# Altium PCB group_14.PcbDoc
Units mm, origin at the board's own origin, x right, y up, seen from the top; angles counter-clockwise.
Board outline 87.88 x 127 mm, 2 copper layers (Top Layer, Bottom Layer), stack 1.1 mm thick; 53 components, 39 nets, 196 pads, 7 vias.
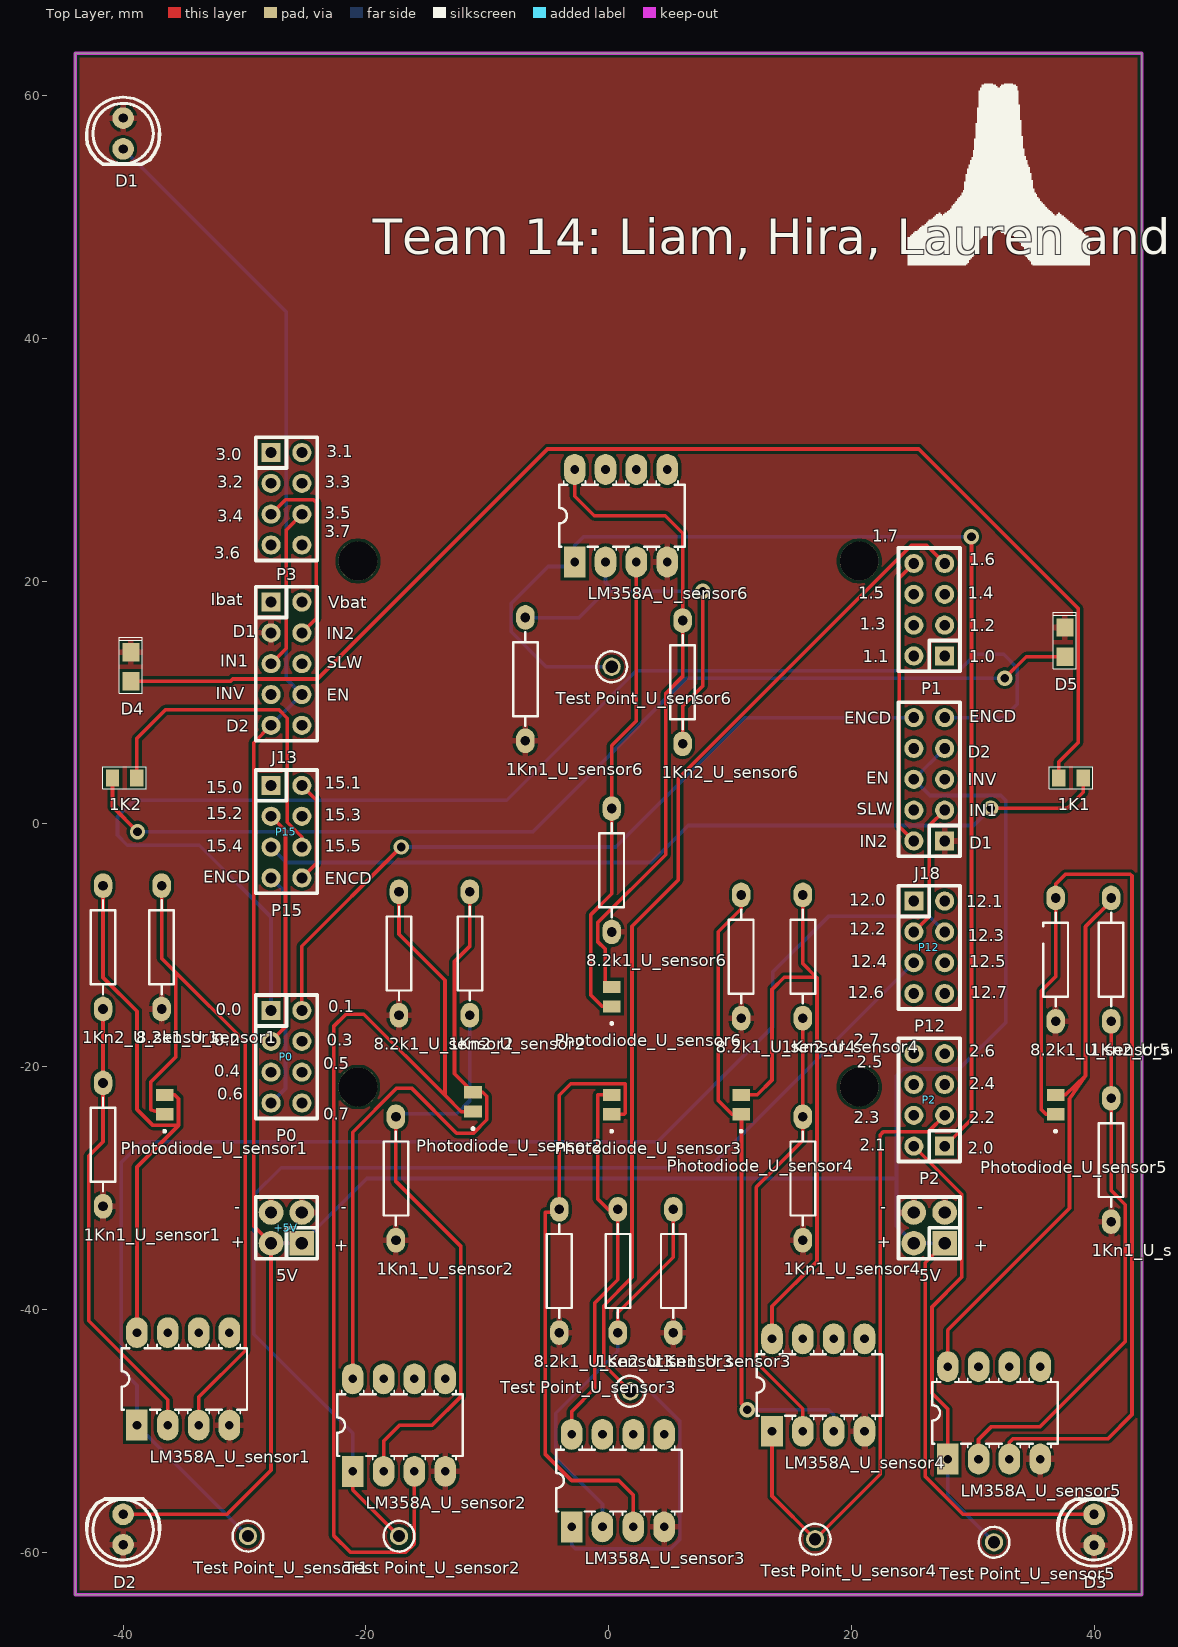
[diagram p0: Top Layer view]
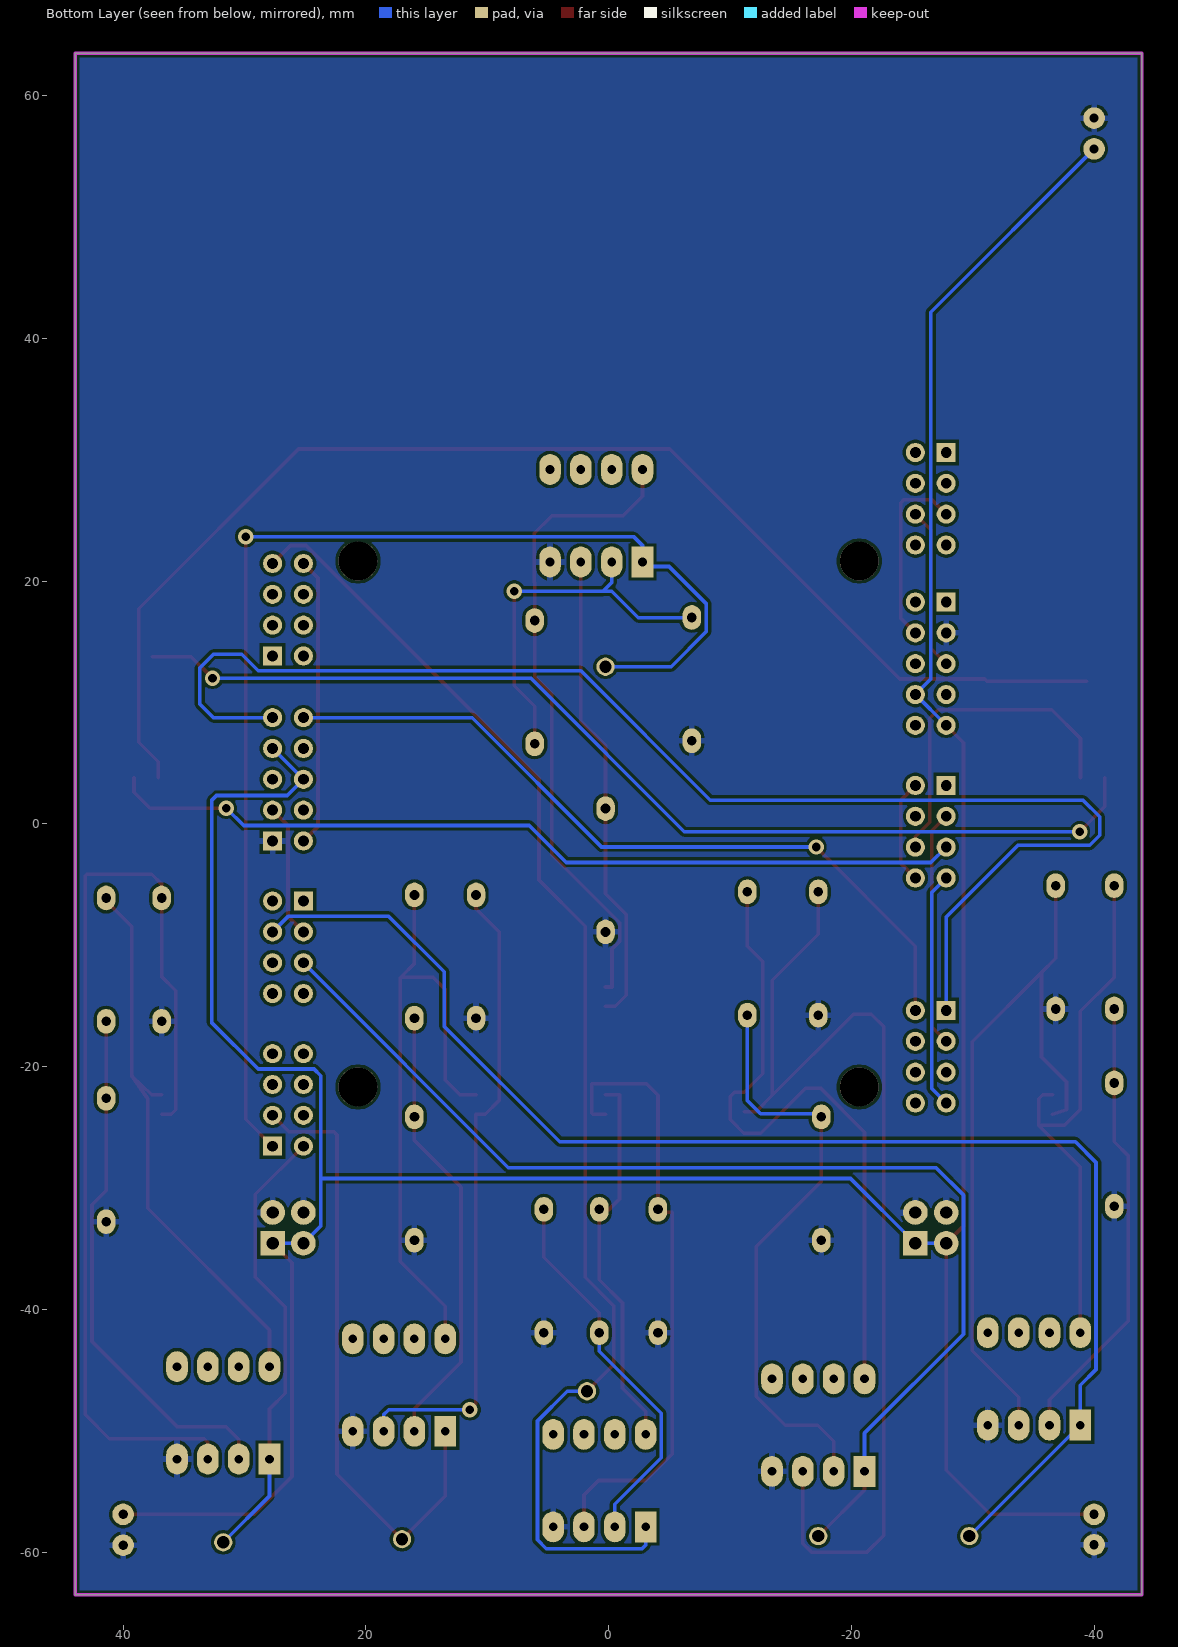
[diagram p1: Bottom Layer view, seen from below]
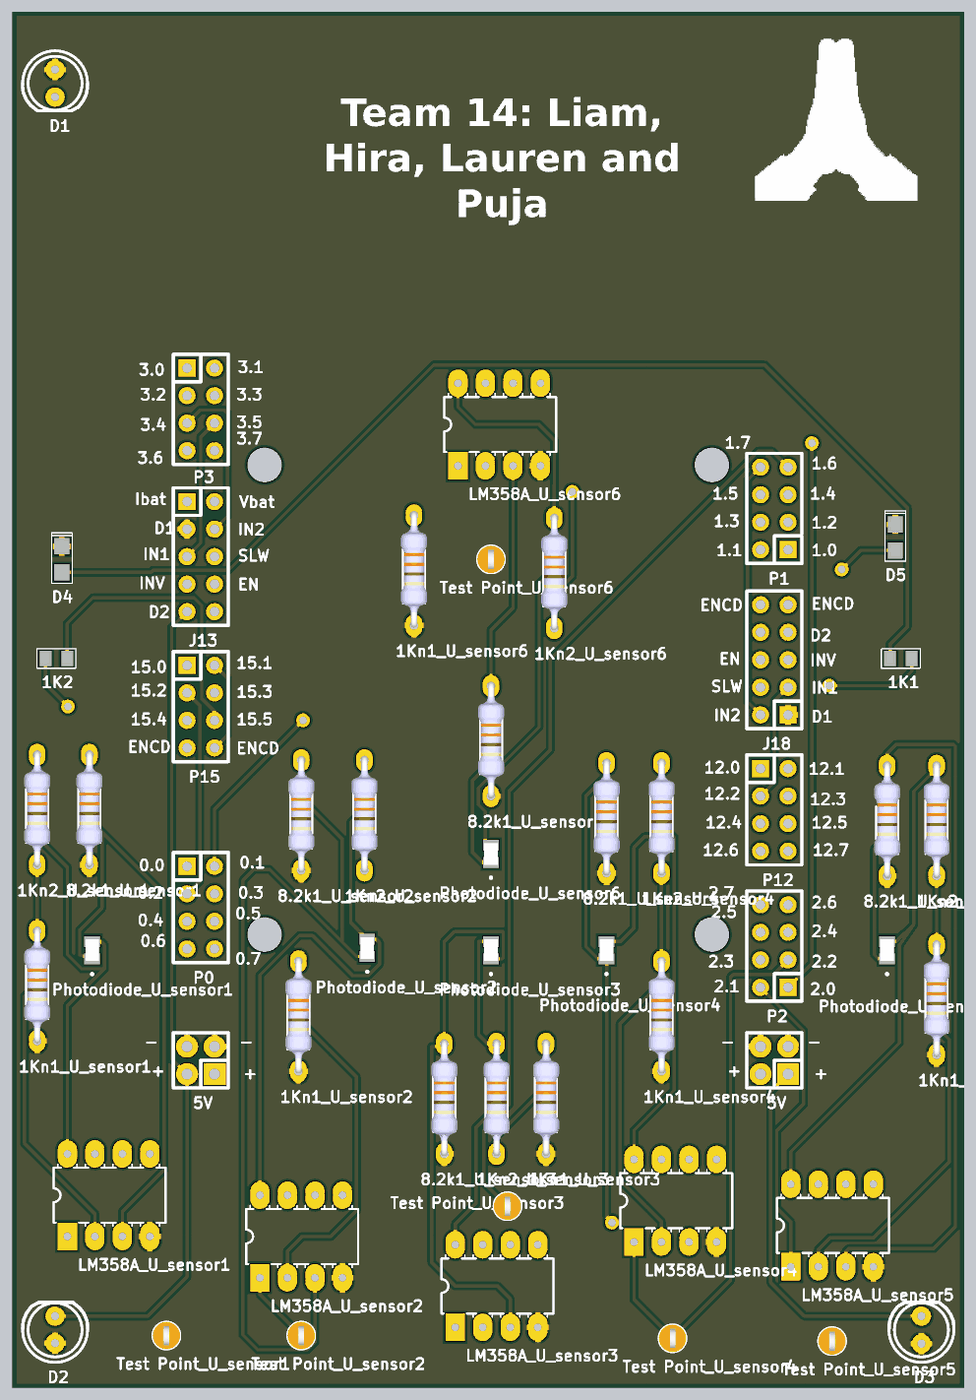
[diagram p2: 3D render of the assembled board from above, using the file's embedded part models]

## Layer stack, top to bottom
Top Solder: solder mask 0.05, Solder Resist, Dk 3.5
Top Layer: signal copper 0.1
Dielectric1: dielectric 0.9, FR-4, Dk 4.8
Bottom Layer: signal copper 0.1
Bottom Solder: solder mask 0.05, Solder Resist, Dk 3.5

## Board outline
-43.942,-63.5 43.942,-63.5 43.942,63.5 -43.942,63.5

## Design rules (kind name [scope] priority, off if disabled: settings)
Clearance [All] p1: gap=0.25 ignorepadtopadclearanceinfootprint=FALSE
HoleSize [All] p1: absolutevalues=TRUE maxlimit=3.2 minlimit=0.025 maxpercent=80.000 minpercent=20.000
PolygonConnect [All] p1: connectstyle=Relief reliefconductorwidth=0.508 reliefentries=4 polygonreliefangle="90 Angle" airgapwidth=0.254
RoomDefinition U_sensor1 [InComponentClass('U_sensor1')] p1: confinementstyle=ConfineIn formatcopy=TRUE lockcomponents=FALSE outline -43.132,-60.368 -27.892,-60.368 -27.892,-3.472 -43.132,-3.472
RoomDefinition U_sensor2 [InComponentClass('U_sensor2')] p2: confinementstyle=ConfineIn formatcopy=TRUE lockcomponents=FALSE outline -22.812,-60.368 -9.858,-60.368 -9.858,-3.98 -22.812,-3.98
RoomDefinition U_sensor3 [InComponentClass('U_sensor3')] p3: confinementstyle=ConfineIn formatcopy=TRUE lockcomponents=FALSE outline -5.54,-59.606 6.906,-59.606 6.906,-21.252 -5.54,-21.252
RoomDefinition U_sensor4 [InComponentClass('U_sensor4')] p4: confinementstyle=ConfineIn formatcopy=TRUE lockcomponents=FALSE outline 9.446,-60.622 22.908,-60.622 22.908,-4.234 9.446,-4.234
RoomDefinition U_sensor6 [InComponentClass('U_sensor6')] p5: confinementstyle=ConfineIn formatcopy=TRUE lockcomponents=FALSE outline -8.334,-16.934 7.668,-16.934 7.668,31.072 -8.334,31.072
RoomDefinition U_sensor5 [InComponentClass('U_sensor5')] p6: confinementstyle=ConfineIn formatcopy=TRUE lockcomponents=FALSE outline 26.21,-60.876 42.974,-60.876 42.974,-4.488 26.21,-4.488
RoutingVias [All] p1: holewidth=0.711 width=1.27 viastyle="Through Hole" minholewidth=0.711 minwidth=1.27 maxholewidth=0.711 maxwidth=1.27
SilkToSolderMaskClearance SilkscreenOverComponentPads [IsPad] p1: minsilkscreentomaskgap=0.1 clearancetoexposedcopper=TRUE
SolderMaskExpansion [All] p1: expansion=0.102 istentingtop=FALSE
Width Width_1 [All] p1: maxlimit=0.35 minlimit=0.254 preferedwidth=0.3
Width [(InNet('+5V') OR InNet('GND'))] p2: maxlimit=0.762 minlimit=0.254 preferedwidth=0.254 minimp=50.000000 maximp=50.000000 favimp=50.000000
28 further rules are at their usual default settings.

## Classes and differential pairs
channel class sensor: U_sensor1 U_sensor2 U_sensor3 U_sensor4 U_sensor5 U_sensor6
net class SensorInput[1..6]: SensorInput1 SensorInput2 SensorInput3 SensorInput4 SensorInput5 SensorInput6
component class U_sensor6: 1Kn1_U_sensor6 1Kn2_U_sensor6 8.2k1_U_sensor6 LM358A_U_sensor6 Photodiode_U_sensor6 "Test Point_U_sensor6"
component class U_sensor5: 1Kn1_U_sensor5 1Kn2_U_sensor5 8.2k1_U_sensor5 LM358A_U_sensor5 Photodiode_U_sensor5 "Test Point_U_sensor5"
component class U_sensor4: 1Kn1_U_sensor4 1Kn2_U_sensor4 8.2k1_U_sensor4 LM358A_U_sensor4 Photodiode_U_sensor4 "Test Point_U_sensor4"
component class U_sensor3: 1Kn1_U_sensor3 1Kn2_U_sensor3 8.2k1_U_sensor3 LM358A_U_sensor3 Photodiode_U_sensor3 "Test Point_U_sensor3"
component class U_sensor2: 1Kn1_U_sensor2 1Kn2_U_sensor2 8.2k1_U_sensor2 LM358A_U_sensor2 Photodiode_U_sensor2 "Test Point_U_sensor2"
component class U_sensor1: 1Kn1_U_sensor1 1Kn2_U_sensor1 8.2k1_U_sensor1 LM358A_U_sensor1 Photodiode_U_sensor1 "Test Point_U_sensor1"

## Components (designator, comment, footprint, x,y, rotation, side; value= is the part's Value field where it differs from the comment)
1K1 "1k" "0805 RES" 38.1,3.81 r0 top
1K2 "1k" "0805 RES" -39.878,3.81 r0 top
1Kn1_U_sensor1 "1K" ECE-RESA0.4TH -41.648,-31.5 r90 top (schematic designator 1Kn1)
1Kn1_U_sensor2 "1K" ECE-RESA0.4TH -17.518,-34.294 r90 top (schematic designator 1Kn1)
1Kn1_U_sensor3 "1K" ECE-RESA0.4TH 5.342,-41.914 r90 top (schematic designator 1Kn1)
1Kn1_U_sensor4 "1K" ECE-RESA0.4TH 16.01,-34.294 r90 top (schematic designator 1Kn1)
1Kn1_U_sensor5 "1K" ECE-RESA0.4TH 41.41,-32.77 r90 top (schematic designator 1Kn1)
1Kn1_U_sensor6 "1K" ECE-RESA0.4TH -6.85,6.854 r90 top (schematic designator 1Kn1)
1Kn2_U_sensor1 "1K" ECE-RESA0.4TH -41.648,-15.244 r90 top (schematic designator 1Kn2)
1Kn2_U_sensor2 "1K" ECE-RESA0.4TH -11.422,-15.752 r90 top (schematic designator 1Kn2)
1Kn2_U_sensor3 "1K" ECE-RESA0.4TH 0.77,-41.914 r90 top (schematic designator 1Kn2)
1Kn2_U_sensor4 "1K" ECE-RESA0.4TH 16.01,-16.006 r90 top (schematic designator 1Kn2)
1Kn2_U_sensor5 "1K" ECE-RESA0.4TH 41.41,-16.26 r90 top (schematic designator 1Kn2)
1Kn2_U_sensor6 "1K" ECE-RESA0.4TH 6.104,6.6 r90 top (schematic designator 1Kn2)
5V "5V" IDC4 27.686,-34.544 r90 top locked
8.2k1_U_sensor1 "8K2" ECE-RESA0.4TH -36.822,-15.244 r90 top (schematic designator 8.2k1)
8.2k1_U_sensor2 "8K2" ECE-RESA0.4TH -17.264,-15.752 r90 top (schematic designator 8.2k1)
8.2k1_U_sensor3 "8K2" ECE-RESA0.4TH -4.056,-41.914 r90 top (schematic designator 8.2k1)
8.2k1_U_sensor4 "8K2" ECE-RESA0.4TH 10.93,-16.006 r90 top (schematic designator 8.2k1)
8.2k1_U_sensor5 "8K2" ECE-RESA0.4TH 36.838,-16.26 r90 top (schematic designator 8.2k1)
8.2k1_U_sensor6 "8K2" ECE-RESA0.4TH 0.262,-8.894 r90 top (schematic designator 8.2k1)
+5V "5V" IDC4 -25.273,-34.544 r90 top locked
D1 "LED" LED0.1/5MM#1 -40,55.62 r180 top locked
D2 "LED" LED0.1/5MM#2 -40,-56.88 r0 top locked
D3 "LED" LED0.1/5MM#1 40,-56.88 r0 top locked
D4 "LTST-C170KGKT" "0805 LED" -39.37,12.954 r90 top
D5 "LTST-C170KGKT" "0805 LED" 37.592,14.986 r90 top
J13 "CON10" IDC10 -27.813,18.288 r270 top locked
J18 "CON10" IDC10 27.686,-1.397 r90 top locked
LM358A_U_sensor1 "LM358" ECE-DIP8TH -38.862,-49.53 r90 top (schematic designator LM358A)
LM358A_U_sensor2 "LM358" ECE-DIP8TH -21.082,-53.34 r90 top (schematic designator LM358A)
LM358A_U_sensor3 "LM358" ECE-DIP8TH -3.048,-57.912 r90 top (schematic designator LM358A)
LM358A_U_sensor4 "LM358" ECE-DIP8TH 13.462,-50.038 r90 top (schematic designator LM358A)
LM358A_U_sensor5 "LM358" ECE-DIP8TH 27.94,-52.324 r90 top (schematic designator LM358A)
LM358A_U_sensor6 "LM358" ECE-DIP8TH -2.794,21.59 r90 top (schematic designator LM358A)
P0 "P0" idc8 -27.813,-15.367 r270 top locked
P1 "P1" idc8 27.686,13.843 r90 top locked
P2 "P2" idc8 27.686,-26.543 r90 top locked
P3 "P3" idc8 -27.813,30.607 r270 top locked
P12 "P12" idc8 25.146,-6.35 r270 top locked
P15 "P15" IDC8 -27.813,3.175 r270 top locked
Photodiode_U_sensor1 "TEMD7000X01" XDCR_TEMD7000X01 -36.576,-23.114 r90 top (schematic designator Photodiode)
Photodiode_U_sensor2 "TEMD7000X01" XDCR_TEMD7000X01 -11.176,-22.898 r90 top (schematic designator Photodiode)
Photodiode_U_sensor3 "TEMD7000X01" XDCR_TEMD7000X01 0.254,-23.114 r90 top (schematic designator Photodiode)
Photodiode_U_sensor4 "TEMD7000X01" XDCR_TEMD7000X01 10.922,-23.114 r90 top (schematic designator Photodiode)
Photodiode_U_sensor5 "TEMD7000X01" XDCR_TEMD7000X01 36.83,-23.114 r90 top (schematic designator Photodiode)
Photodiode_U_sensor6 "TEMD7000X01" XDCR_TEMD7000X01 0.254,-14.224 r90 top (schematic designator Photodiode)
"Test Point_U_sensor1" "5003" TP_TH -29.718,-58.674 r90 top (schematic designator "Test Point")
"Test Point_U_sensor2" "5003" TP_TH -17.272,-58.674 r90 top (schematic designator "Test Point")
"Test Point_U_sensor3" "5003" TP_TH 1.778,-46.736 r90 top (schematic designator "Test Point")
"Test Point_U_sensor4" "5003" TP_TH 17.018,-58.928 r90 top (schematic designator "Test Point")
"Test Point_U_sensor5" "5003" TP_TH 31.75,-59.182 r90 top (schematic designator "Test Point")
"Test Point_U_sensor6" "5003" TP_TH 0.254,12.954 r90 top (schematic designator "Test Point")

## Footprints (in the part's own frame and the unit in brackets; to place one, negate y for a bottom-side part, rotate by r counter-clockwise, add the part's x,y. Pads: shape width x height; smd on the part's side, far side on the other; paste and mask are expansions set on the pad)
"0805 LED" [mm] "RED AS AlGaAs SMD LED, Body; 2mm x 1.25 mm (LxW)"
  rect 1.5x1.4 smd: 1(-1.2,0) 2(1.2,0)
  silkscreen extent -2.2,-0.95 2.45,0.95, body extent -1,-0.63 1,0.63, height 1.1
"0805 RES" [mm] "http://www.digikey.co.nz/Web%20Export/Supplier%20Content/Vishay_8026/PDF/VishayBeyschlag_SolderPad.pdf?redirected=1 with dimension G modified by +0.25mm"
  rect 1.1x1.4 smd: 1(-1,0) 2(1,0)
  silkscreen extent -1.8,-0.9 1.8,0.9, body extent -1.04,-0.66 1.04,0.66, height 0.61
ECE-DIP8TH [mil] "8 pin Dual in line"
  rect 100x70 hole 28: 1(0,0)
  oval 100x70 hole 28: 2(0,-100) 3(0,-200) 4(0,-300) 5(300,-300) 6(300,-200) 7(300,-100) 8(300,0)
  silkscreen extent 37,-357 263,50
ECE-RESA0.4TH [mil] "Resistor Axial 10mm"
  oval 80x60 hole 31.5: 1(0.16,0.32) 2(400.16,0.32)
  silkscreen extent 48,-40 352,40, body extent -7,-47 417,47, height 95
IDC4 [mil]
  rect 80x80 hole 40: 1(0,0)
  round 80 hole 40: 2(0,100) 3(100,0) 4(100,100)
  silkscreen extent -50,-50 150,150
idc8 [mil]
  rect 62x62 hole 35: 1(0,0)
  round 62 hole 35: 2(0,100) 3(100,0) 4(100,100) 5(200,0) 6(200,100) 7(300,0) 8(300,100)
  silkscreen extent -50,-50 350,150
IDC8 [mil]
  rect 62x62 hole 35: 1(0,0)
  round 62 hole 35: 2(0,100) 3(100,0) 4(100,100) 5(200,0) 6(200,100) 7(300,0) 8(300,100)
  silkscreen extent -50,-50 350,150
IDC10 [mil]
  rect 62x62 hole 35: 1(0,0)
  round 62 hole 35: 2(0,100) 3(100,0) 4(100,100) 5(200,0) 6(200,100) 7(300,0) 8(300,100) 9(400,0) 10(400,100)
  silkscreen extent -50,-50 450,150
LED0.1/5MM#1 [mil]
  round 70 hole 30: A(0,0) K(0,-100)
  silkscreen extent -118,-168 118,50
LED0.1/5MM#2 [mil]
  round 70 hole 30: A(0,0) K(0,-98.42)
  silkscreen extent -118,-168 118,50
TP_TH [mm] "Test Point, Through Hole, Dia 2.54mm"
  round 1.5 hole 1: 1(0,0)
  silkscreen extent -1.27,-1.27 1.27,1.27, body extent -1.27,-1.27 1.27,1.27, height 4.57
XDCR_TEMD7000X01 [mm]
  rect 1x1.45 smd: A(-0.8,0) C(0.8,0)
  silkscreen extent -2.3,-0.1 -2.1,0.1, body extent -1,-0.63 1,0.63, height 0.85

## Part data
1K1 1K2: library part Res_SMT_0805, "0805 resistor", ComponentLink1Description=https://nz.mouser.com/datasheet/2/315/AOA0000C304-1149620.pdf, LatestRevisionDate=17-Jul-2002, LatestRevisionNote="Re-released for DXP Platform.", PackageReference=AXIAL-0.4, Published=8-Jun-2000, Publisher="Altium Limited"
1Kn1_U_sensor1 1Kn1_U_sensor2 1Kn1_U_sensor3 1Kn1_U_sensor4 1Kn1_U_sensor5 1Kn1_U_sensor6 1Kn2_U_sensor1 1Kn2_U_sensor2 1Kn2_U_sensor3 1Kn2_U_sensor4 1Kn2_U_sensor5 1Kn2_U_sensor6: library part RES000037, "RES MF 1K0 TH", Size/Package="Axial 10mm", Voltage/Current=0.6W, Assembly Method="Through hole", Category=Resistor, Component Type=NA, Item Type=Item, Path="ece/ts/Lists/Stock Inventory", Status=Active, Supplier1="Active components", Supplier1-PN=T183997, UoA Stock#=RES000037
5V +5V: library part CON4, "Connector"
8.2k1_U_sensor1 8.2k1_U_sensor2 8.2k1_U_sensor3 8.2k1_U_sensor4 8.2k1_U_sensor5 8.2k1_U_sensor6: library part RES000048, "RES MF 8K2 TH", Size/Package="Axial 10mm", Voltage/Current=0.6W, Assembly Method="Through hole", Category=Resistor, Component Type=NA, Item Type=Item, Path="ece/ts/Lists/Stock Inventory", Status=Active, Supplier1="Active components", Supplier1-PN=T184082, UoA Stock#=RES000048
D4 D5: library part LED_SMT_0805, "SMT LED 0805 size", Color=Green, Current - Test=20mA, Lens Color=Colorless, Manufacturer="Lite-On Inc.", Millicandela Rating=35mcd, Package / Case="0805 (2012 Metric)", Supplier Part Number 1=160-1414-1-ND, Voltage - Forward (Vf) (Typ)=2V, Category=Optoelectronics, ComponentLink1Description=http://optoelectronics.liteon.com/upload/download/DS22-2000-073/LTST-C170KGKT.pdf, ComponentLink1URL=http://optoelectronics.liteon.com/upload/download/DS22-2000-073/LTST-C170KGKT.pdf, Features=-, Height (Max)=1.10mm, Lens Style/Size="Rectangle with Flat Top, 1.40mm x 1.25mm", Lens Transparency=Clear, Manufacturer Part Number=LTST-C170KGKT, Mounting Type="Surface Mount", Packaging="Cut Tape (CT)", Part Status=Active, Pricing 1="1=0.62, 10=0.459, 25=0.338, 100=0.2415, 250=0.16416, 500=0.14486, 1000=0.11347 (NZD)", RoHS="RoHS Compliant", Size / Dimension="2.00mm L x 1.25mm W", Stock 1=503069, Supplier 1=Digi-Key, Viewing Angle=130°, Wavelength - Dominant=571nm, Wavelength - Peak=574nm
J13 J18: "Connector"
LM358A_U_sensor1 LM358A_U_sensor2 LM358A_U_sensor3 LM358A_U_sensor4 LM358A_U_sensor5 LM358A_U_sensor6: library part OPA000005, "IC OPAMP LM358 DUAL TH", Manufactuer=Fairchild, Manufacturer-PN=LM358N, Size/Package=DIP8, Assembly Method="Through hole", Category=OpAmp, Datasheet Link=http://share.engineering.auckland.ac.nz/ece/ts/Student%20Documents/LM358.pdf, Item Type=Item, Path="ece/ts/Lists/Stock Inventory", Status=Active, Supplier1=Digikey, Supplier1-PN=LM358NFS-ND, Supplier2="Active Components", Supplier2-PN=LM358N, UoA Stock#=OPA000005
P0 P1 P2 P3: library part CON8, "Connector"
P12 P15: library part CON8_1, "Connector"
Photodiode_U_sensor1 Photodiode_U_sensor2 Photodiode_U_sensor3 Photodiode_U_sensor4 Photodiode_U_sensor5 Photodiode_U_sensor6: "Photodiode 900nm 100ns 120Â° 0805 (2012 Metric)", Package="0805 Vishay", Availability="In Stock", Check_prices=https://www.snapeda.com/parts/TEMD7000X01/Vishay+Semiconductor+Opto+Division/view-part/?ref=eda, MF="Vishay Semiconductor", MP=TEMD7000X01, Price=None, Purchase-URL=https://pricing.snapeda.com/search/part/TEMD7000X01/?ref=eda, SnapEDA_Link=https://www.snapeda.com/parts/TEMD7000X01/Vishay+Semiconductor+Opto+Division/view-part/?ref=snap
"Test Point_U_sensor1" "Test Point_U_sensor2" "Test Point_U_sensor3" "Test Point_U_sensor4" "Test Point_U_sensor5" "Test Point_U_sensor6": library part TestPoint, "Test Point, Orange, 1-Pin THD, RoHS", Forward Current="3 A", Forward Voltage="1.08 V", Max Operating Temperature="150 degC", Max Surge Current="80 A", Min Operating Temperature="-65 degC", Package Quantity=500, Peak Reverse Current="600 uA", ComponentLink1Description="Manufacturer URL", ComponentLink1URL=http://www.keyelco.com/, ComponentLink2Description=Datasheet, ComponentLink2URL=http://keyelco.com/userAssets/file/M65p56.pdf, DatasheetVersion=Jun-15, Diameter="5.3 mm", Height="0.25 inch", Length="9.5 mm", Mount="Through Hole", PackageDescription="1-Pin Through Hole Device, Dia 2.54 mm", PackageReference=5003, Packaging=Bulk, Pins=2, Radiation Hardening=No, REACH SVHC="No SVHC", RoHSCompliant=true, Weight="0.01 lb", Width="0.25 inch"

## Free pads (board coordinates)
  round 3.2 hole 3.2 unplated: 1(-20.65,-21.666) 1(-20.65,21.666) 1(20.65,-21.666) 1(20.65,21.666)

## Via types
v1: diameter 1.27, hole 0.711, Top Layer to Bottom Layer, 7 vias

## Nets (pads, with @x,y where several pads share a name; then routed paths per layer and width w, separated by ;. In a path a pad name is that pad's centre, name@x,y a point inside that pad or via, vN(x,y) a via of type N, cw(c..) or ccw(c..) an arc to the next point about the centre after c; other vN are vias at no path point)
+5V: 5V.1 5V.2 +5V.1 +5V.2 D1.A D2.A D3.A J13.8 J13.9 J18.6 J18.7 | length 277.6
  Top Layer w0.3: D2.A -31.44,-56.88 -27.813,-53.253 +5V.2 -29.238,-33.119 -29.238,6.703 J13.9 ; 5V.1 26.083,-36.147 26.083,-53.764 29.199,-56.88 D3.A
  Bottom Layer w0.3: D1.A -26.546,42.166 -26.546,11.941 J13.8 -25.276,10.668 -27.813,8.131 J13.9 ; +5V.2 +5V.1 -19.931,-29.202 23.721,-29.202 ; 5V.1 5V.2 23.721,-33.119 23.721,-29.202 ; J18.7 27.683,6.223 25.146,3.686 J18.6 26.484,2.345 32.306,2.345 32.712,1.938 32.712,-16.35 28.877,-20.185 24.28,-20.185 23.721,-20.744 23.721,-29.202
+5V_U_sensor1: 1Kn2_U_sensor1.2 LM358A_U_sensor1.8 Photodiode_U_sensor1.C | length 45.5
  Top Layer w0.3: 1Kn2_U_sensor1.2 -41.656,-12.644 -38.862,-15.438 -38.862,-23.515 -37.544,-24.833 -35.436,-24.833 ; LM358A_U_sensor1.8 -38.862,-28.26 -35.436,-24.833 ; Photodiode_U_sensor1.C -35.766,-22.314 -35.436,-22.644 -35.436,-24.833
+5V_U_sensor2: 1Kn2_U_sensor2.2 LM358A_U_sensor2.8 Photodiode_U_sensor2.C | length 55.8
  Top Layer w0.3: LM358A_U_sensor2.8 -21.082,-25.389 -17.453,-21.76 -16.233,-21.76 -12.525,-25.468 -11.128,-25.468 -10.036,-24.376 -10.036,-22.428 -10.366,-22.098 Photodiode_U_sensor2.C -12.703,-20.571 -12.703,-11.321 -11.43,-10.048 1Kn2_U_sensor2.2
+5V_U_sensor3: 1Kn2_U_sensor3.2 LM358A_U_sensor3.8 Photodiode_U_sensor3.C | length 31.9
  Top Layer w0.3: LM358A_U_sensor3.8 -3.048,-48.402 -1.146,-46.5 -1.146,-39.464 0.762,-37.556 1Kn2_U_sensor3.2@0.762,-31.768 ; Photodiode_U_sensor3.C -0.892,-22.314 -0.892,-30.904 -0.028,-31.768 1Kn2_U_sensor3.2@0.762,-31.768 ; 1Kn2_U_sensor3.2 1Kn2_U_sensor3.2@0.762,-31.768
+5V_U_sensor4: 1Kn2_U_sensor4.2 LM358A_U_sensor4.8 Photodiode_U_sensor4.C | length 53.2
  Top Layer w0.3: Photodiode_U_sensor4.C 12.24,-22.314 13.459,-21.095 13.459,-13.632 14.475,-12.616 17.117,-12.616 ; LM358A_U_sensor4.8 13.462,-39.743 17.168,-36.038 17.168,-12.667 17.117,-12.616 ; 1Kn2_U_sensor4.2 16.002,-11.501 17.117,-12.616
+5V_U_sensor5: 1Kn2_U_sensor5.2 LM358A_U_sensor5.8 Photodiode_U_sensor5.C | length 47.1
  Top Layer w0.3: LM358A_U_sensor5.8 27.94,-41.699 37.97,-31.669 37.97,-22.644 39.291,-20.744 ; Photodiode_U_sensor5.C 37.64,-22.314 39.291,-20.744 ; 1Kn2_U_sensor5.2 41.402,-6.342 39.291,-8.453 39.291,-20.744
+5V_U_sensor6: 1Kn2_U_sensor6.2 LM358A_U_sensor6.8 Photodiode_U_sensor6.C | length 53.5
  Top Layer w0.3: LM358A_U_sensor6.8 -2.794,27.008 -1.194,25.408 4.671,25.408 6.119,23.96 6.119,19.921 6.096,19.899 1Kn2_U_sensor6.2 6.096,12.149 4.696,10.749 4.696,-2.532 -0.908,-8.136 -0.908,-9.679 -0.282,-10.305 -0.282,-13.424 Photodiode_U_sensor6.C
GND: 1Kn1_U_sensor1.1 1Kn1_U_sensor2.1 1Kn1_U_sensor3.1 1Kn1_U_sensor4.1 1Kn1_U_sensor5.1 1Kn1_U_sensor6.1 5V.3 5V.4 8.2k1_U_sensor1.1 8.2k1_U_sensor2.1 8.2k1_U_sensor3.1 8.2k1_U_sensor4.1 8.2k1_U_sensor5.1 8.2k1_U_sensor6.1 +5V.3 +5V.4 D1.K D2.K D3.K D4.2 D5.2 J13.3 J18.1 LM358A_U_sensor1.4 LM358A_U_sensor2.4 LM358A_U_sensor3.4 LM358A_U_sensor4.4 LM358A_U_sensor5.4 LM358A_U_sensor6.4
Net1K1_1: 1K1.1 D4.1 | length 106
  Top Layer w0.3: D4.1 -31.157,11.754 -30.965,11.946 -23.98,11.946 -5.032,30.894 25.55,30.894 38.707,17.737 38.707,6.739 37.1,5.132 1K1.1
Net1K1_2: 1K1.2 P15.5 | length 71
  Top Layer w0.3: v1(31.493,1.303) 37.779,1.303 39.1,2.624 1K1.2
  Bottom Layer w0.3: P15.5 -26.551,-3.167 3.502,-3.167 6.55,-0.119 30.071,-0.119 v1(31.493,1.303)
Net1K2_1: 1K2.1 D5.1 | length 87.7
  Top Layer w0.3: 1K2.1 -40.878,1.437 v1(-38.814,-0.627) ; v1(32.636,12.022) 34.4,13.786 D5.1
  Bottom Layer w0.3: v1(-38.814,-0.627) -6.226,-0.627 6.423,12.022 v1(32.636,12.022)
Net1K2_2: 1K2.2 P15.6 | length 28
  Top Layer w0.3: 1K2.2 -38.878,7.044 -36.516,9.406 -27.155,9.406 -26.47,8.72 -26.47,0.152 -25.273,-1.044 P15.6
Net1Kn1_U_sensor1_2: 1Kn1_U_sensor1.2 1Kn2_U_sensor1.1 LM358A_U_sensor1.2 | length 37.5
  Top Layer w0.3: 1Kn2_U_sensor1.1 1Kn1_U_sensor1.2 -41.656,-26.177 -42.827,-27.348 -42.827,-40.937 -36.322,-47.442 LM358A_U_sensor1.2
Net1Kn1_U_sensor2_2: 1Kn1_U_sensor2.2 1Kn2_U_sensor2.1 LM358A_U_sensor2.2 | length 49.5
  Top Layer w0.3: LM358A_U_sensor2.2 -18.542,-50.863 -17.224,-49.545 -14.554,-49.545 -12.169,-47.16 -12.169,-34.816 -17.526,-29.459 1Kn1_U_sensor2.2
  Bottom Layer w0.3: 1Kn1_U_sensor2.2 -17.526,-23.868 -12.522,-23.868 -11.43,-22.776 1Kn2_U_sensor2.1
Net1Kn1_U_sensor3_2: 1Kn1_U_sensor3.2 1Kn2_U_sensor3.1 LM358A_U_sensor3.2 | length 31.8
  Top Layer w0.3: 1Kn2_U_sensor3.1 0.762,-40.275 5.334,-35.703 1Kn1_U_sensor3.2
  Bottom Layer w0.3: LM358A_U_sensor3.2 -0.508,-56.053 -4.346,-52.215 -4.346,-48.557 0.762,-43.449 1Kn2_U_sensor3.1
Net1Kn1_U_sensor4_2: 1Kn1_U_sensor4.2 1Kn2_U_sensor4.1 LM358A_U_sensor4.2 | length 37.2
  Top Layer w0.3: LM358A_U_sensor4.2 16.002,-48.176 12.164,-44.338 12.164,-29.916 16.002,-26.078 1Kn1_U_sensor4.2 1Kn2_U_sensor4.1
Net1Kn1_U_sensor5_2: 1Kn1_U_sensor5.2 1Kn2_U_sensor5.1 LM358A_U_sensor5.2 | length 43.9
  Top Layer w0.3: LM358A_U_sensor5.2 30.48,-50.713 31.544,-49.649 35.557,-49.649 42.568,-42.639 42.568,-31.361 41.402,-30.196 1Kn1_U_sensor5.2 1Kn2_U_sensor5.1
Net1Kn1_U_sensor6_2: 1Kn1_U_sensor6.2 1Kn2_U_sensor6.1 LM358A_U_sensor6.2 | length 31.5
  Top Layer w0.3: 1Kn2_U_sensor6.1 6.096,9.711 7.77,11.384 v1(7.77,19.185)
  Bottom Layer w0.3: 1Kn1_U_sensor6.2 -6.858,17 -2.438,17 -0.254,19.185 0.457,19.185 ; LM358A_U_sensor6.2 -0.254,19.896 0.457,19.185 ; v1(7.77,19.185) 0.457,19.185
Net8.2k1_U_sensor1_2: 8.2k1_U_sensor1.2 LM358A_U_sensor1.3 Photodiode_U_sensor1.A | length 62.3
  Top Layer w0.3: 8.2k1_U_sensor1.2 -36.83,-11.067 -35.664,-12.232 ; Photodiode_U_sensor1.A -37.722,-23.538 -37.722,-21.252 -35.664,-19.195 -35.664,-12.232 ; LM358A_U_sensor1.3 -33.782,-47.233 -29.949,-43.401 -29.949,-17.947 -35.664,-12.232
Net8.2k1_U_sensor2_2: 8.2k1_U_sensor2.2 LM358A_U_sensor2.3 Photodiode_U_sensor2.A | length 89
  Top Layer w0.3: 8.2k1_U_sensor2.2 -17.272,-9.085 -13.483,-12.875 -13.483,-22.359 ; LM358A_U_sensor2.3 -16.002,-59.273 -16.716,-59.987 -21.288,-59.987 -22.66,-58.615 -22.66,-16.68 -21.644,-15.664 -20.178,-15.664 -13.483,-22.359 ; Photodiode_U_sensor2.A -12.144,-23.698 -13.483,-22.359
Net8.2k1_U_sensor3_2: 8.2k1_U_sensor3.2 LM358A_U_sensor3.3 Photodiode_U_sensor3.A | length 51.4
  Top Layer w0.3: Photodiode_U_sensor3.A 1.293,-23.914 1.379,-23.828 1.379,-21.404 -3.127,-21.404 -4.064,-22.341 8.2k1_U_sensor3.2 -4.064,-31.996 -5.235,-31.996 -5.235,-51.91 -3.051,-54.094 0.838,-54.094 2.032,-55.288 LM358A_U_sensor3.3
Net8.2k1_U_sensor4_2: 8.2k1_U_sensor4.2 LM358A_U_sensor4.3 Photodiode_U_sensor4.A | length 53.3
  Top Layer w0.3: 8.2k1_U_sensor4.2 10.922,-6.977 9.025,-8.875 9.025,-22.776 10.163,-23.914 Photodiode_U_sensor4.A 10.945,-23.914 10.945,-47.77 v1(11.427,-48.252)
  Bottom Layer w0.3: v1(11.427,-48.252) 18.11,-48.252 18.542,-48.684 LM358A_U_sensor4.3
Net8.2k1_U_sensor5_2: 8.2k1_U_sensor5.2 LM358A_U_sensor5.3 Photodiode_U_sensor5.A | length 83.9
  Top Layer w0.3: LM358A_U_sensor5.3 33.02,-50.942 33.322,-50.64 41.145,-50.64 43.126,-48.659 43.126,-4.285 42.974,-4.132 37.64,-4.132 36.83,-4.942 8.2k1_U_sensor5.2 36.83,-12.562 35.659,-13.734 35.659,-23.538 36.035,-23.914 Photodiode_U_sensor5.A
Net8.2k1_U_sensor6_2: 8.2k1_U_sensor6.2 LM358A_U_sensor6.3 Photodiode_U_sensor6.A | length 39.3
  Top Layer w0.3: Photodiode_U_sensor6.A -0.541,-15.024 -1.458,-14.107 -1.458,-7.465 0.254,-5.753 8.2k1_U_sensor6.2 0.254,6.459 2.286,8.491 LM358A_U_sensor6.3
NetJ13_4: J13.4 P3.5 | length 15.6
  Top Layer w0.3: P3.5 -26.611,26.729 -24.336,26.729 -24.082,26.475 -24.082,16.939 J13.4
NetJ13_5: J13.5 P3.6 | length 13.4
  Top Layer w0.3: J13.5 -26.546,14.475 -26.546,24.254 P3.6
NetJ18_2: J18.2 P1.8 | length 23.9
  Top Layer w0.3: J18.2 23.949,-0.2 23.949,20.266 P1.8
NetJ18_3: J18.3 P12.3 | length 11.1
  Top Layer w0.3: P12.3 26.413,-7.623 26.413,-0.13 J18.3
NetJ18_9: J18.9 P0.1 | length 114.3
  Bottom Layer w0.3: P0.1 -27.813,-7.666 -33.734,-1.745 -39.652,-1.745 -40.465,-0.932 -40.465,0.592 -39.093,1.964 -8.385,1.964 2.283,12.632 28.877,12.632 30.223,13.978 32.56,13.978 33.678,12.86 33.678,9.881 32.56,8.763 J18.9
NetJ18_10: J18.10 P0.2 | length 63.5
  Top Layer w0.3: P0.2 -25.273,-10.073 v1(-17.097,-1.897)
  Bottom Layer w0.3: v1(-17.097,-1.897) 0.581,-1.897 11.242,8.763 J18.10
NetP0_3: P0.3 P15.3 | length 19.5
  Top Layer w0.3: P0.3 -26.622,-16.716 -26.622,-0.556 P15.3
NetP0_7: P0.7 P15.7 | length 19.5
  Bottom Layer w0.3: P0.7 -26.622,-21.796 -26.622,-5.636 P15.7
NetP15_2: P15.2 P15.8 | length 8.6
  Top Layer w0.3: P15.8 -24.082,-3.254 -24.082,1.984 P15.2
SensorInput1: "Test Point_U_sensor1.1" LM358A_U_sensor1.1 P12.4 | length 114.5
  Bottom Layer w0.3: -29.718,-58.674 LM358A_U_sensor1.1 -38.862,-47.995 -38.862,-46.246 -40.16,-44.947 -40.16,-27.881 -38.458,-26.18 4.036,-26.18 13.535,-16.68 13.535,-12.184 18.107,-7.612 26.408,-7.612 P12.4
SensorInput2: "Test Point_U_sensor2.1" LM358A_U_sensor2.1 P12.5 | length 95.4
  Top Layer w0.3: LM358A_U_sensor2.1 -21.082,-54.864 -17.272,-58.674
  Bottom Layer w0.3: LM358A_U_sensor2.1 -21.082,-50.185 -29.238,-42.029 -29.238,-30.574 -26.978,-28.313 8.263,-28.313 P12.5
SensorInput3: "Test Point_U_sensor3.1" LM358A_U_sensor3.1 P1.7 | length 110.2
  Top Layer w0.3: 1.778,-46.736 -0.409,-44.549 -0.409,-39.692 1.929,-37.354 1.929,-8.424 5.738,-4.615 5.738,3.747 24.935,22.944 26.205,22.944 P1.7
  Bottom Layer w0.3: LM358A_U_sensor3.1 -3.048,-59.406 -2.746,-59.708 5.128,-59.708 5.865,-58.971 5.865,-49.192 3.409,-46.736 1.778,-46.736
SensorInput4: "Test Point_U_sensor4.1" LM358A_U_sensor4.1 P2.3 | length 51.9
  Top Layer w0.3: LM358A_U_sensor4.1 13.462,-55.372 17.018,-58.928 22.375,-53.571 22.375,-25.621 22.654,-25.341 26.348,-25.341 P2.3
SensorInput5: "Test Point_U_sensor5.1" LM358A_U_sensor5.1 P2.2 | length 37.4
  Top Layer w0.3: P2.2 29.106,-30.503 29.106,-37.33 26.642,-39.794 26.642,-46.903 27.94,-48.201 LM358A_U_sensor5.1
  Bottom Layer w0.3: LM358A_U_sensor5.1 27.94,-55.372 31.75,-59.182
SensorInput6: "Test Point_U_sensor6.1" LM358A_U_sensor6.1 P2.1 | length 104.2
  Top Layer w0.3: P2.1 29.893,-24.336 v1(29.893,23.681)
  Bottom Layer w0.3: 0.254,12.954 -5.151,12.954 -8.029,15.832 -8.029,18.169 -4.981,21.217 -2.794,21.217 LM358A_U_sensor6.1 -2.794,22.944 -2.057,23.681 v1(29.893,23.681)
pads on no net: J13.1 J13.2 J13.6 J13.7 J13.10 J18.4 J18.5 J18.8 LM358A_U_sensor1.5 LM358A_U_sensor1.6 LM358A_U_sensor1.7 LM358A_U_sensor2.5 LM358A_U_sensor2.6 LM358A_U_sensor2.7 LM358A_U_sensor3.5 LM358A_U_sensor3.6 LM358A_U_sensor3.7 LM358A_U_sensor4.5 LM358A_U_sensor4.6 LM358A_U_sensor4.7 LM358A_U_sensor5.5 LM358A_U_sensor5.6 LM358A_U_sensor5.7 LM358A_U_sensor6.5 LM358A_U_sensor6.6 LM358A_U_sensor6.7 P0.4 P0.5 P0.6 P0.8 P1.1 P1.2 P1.3 P1.4 P1.5 P1.6 P2.4 P2.5 P2.6 P2.7 P2.8 P3.1 P3.2 P3.3 P3.4 P3.7 P3.8 P12.1 P12.2 P12.6 P12.7 P12.8 P15.1 P15.4

## Polygon pours and split planes (outlines as drawn)
GND on Top Layer "GND_L01_P000" (solid, pour order 0): -43.942,63.5 43.942,63.5 43.942,-63.5 -43.942,-63.5 -43.942,-39.116
GND on Bottom Layer "GND_L02_P002" (solid, pour order 2): -43.942,63.5 43.942,63.5 43.942,-63.5 -43.942,-63.5

## Keep-outs
Keep-Out Layer:
  the board outline again, w0.254

## Silkscreen, mask and mechanical layers (free items; w line width, h text height)
Top Overlay:
  region: 291 vertices and 0 holes, not listed, extent 24.638,46.022 39.624,61.008
  text "Team 14: Liam, Hira, Lauren and Puja" at -19.431,45.974 h5
  text "3.1" at -23.241,30.226 h1
  text "3.0" at -32.385,29.972 h1
  text "3.2" at -32.258,27.686 h1
  text "3.3" at -23.368,27.686 h1
  text "3.5" at -23.368,25.146 h1
  text "3.4" at -32.258,24.892 h1
  text "3.7" at -23.368,23.622 h1
  text "1.7" at 21.717,23.241 h1
  text "3.6" at -32.512,21.844 h1
  text "1.6" at 29.718,21.336 h1
  text "1.5" at 20.574,18.542 h1
  text "1.4" at 29.591,18.542 h1
  text "Ibat" at -32.766,18.034 h1
  text "Vbat" at -23.114,17.78 h1
  text "1.3" at 20.701,16.002 h1
  text "1.2" at 29.718,15.875 h1
  text "D1" at -30.988,15.367 h1
  text "IN2" at -23.241,15.24 h1
  text "1.1" at 20.955,13.335 h1
  text "1.0" at 29.718,13.335 h1
  text "IN1" at -32.004,12.954 h1
  text "SLW" at -23.241,12.827 h1
  text "INV" at -32.385,10.287 h1
  text "EN" at -23.241,10.16 h1
  text "ENCD" at 29.718,8.382 h1
  text "ENCD" at 19.431,8.255 h1
  text "D2" at -31.496,7.62 h1
  text "D2" at 29.591,5.461 h1
  text "EN" at 21.209,3.302 h1
  text "INV" at 29.591,3.175 h1
  text "15.1" at -23.368,2.921 h1
  text "15.0" at -33.147,2.54 h1
  text "SLW" at 20.447,0.762 h1
  text "IN1" at 29.718,0.635 h1
  text "15.2" at -33.147,0.381 h1
  text "15.3" at -23.368,0.254 h1
  text "IN2" at 20.701,-1.905 h1
  text "D1" at 29.718,-2.032 h1
  text "15.4" at -33.147,-2.286 h1
  text "15.5" at -23.368,-2.286 h1
  text "ENCD" at -33.401,-4.826 h1
  text "ENCD" at -23.368,-4.953 h1
  text "12.0" at 19.812,-6.731 h1
  text "12.1" at 29.464,-6.858 h1
  text "12.2" at 19.812,-9.144 h1
  text "12.3" at 29.591,-9.652 h1
  text "12.4" at 19.939,-11.811 h1
  text "12.5" at 29.718,-11.811 h1
  text "12.6" at 19.685,-14.351 h1
  text "12.7" at 29.845,-14.351 h1
  text "0.1" at -23.114,-15.494 h1
  text "0.0" at -32.385,-15.748 h1
  text "0.2" at -32.512,-18.288 h1
  text "0.3" at -23.241,-18.288 h1
  text "2.7" at 20.193,-18.288 h1
  text "2.6" at 29.718,-19.177 h1
  text "2.5" at 20.447,-20.066 h1
  text "0.5" at -23.495,-20.193 h1
  text "0.4" at -32.512,-20.828 h1
  text "2.4" at 29.718,-21.844 h1
  text "0.6" at -32.258,-22.733 h1
  text "0.7" at -23.495,-24.384 h1
  text "2.3" at 20.193,-24.638 h1
  text "2.2" at 29.718,-24.638 h1
  text "2.1" at 20.701,-26.924 h1
  text "2.0" at 29.591,-27.178 h1
  text "-" at -30.353,-31.242 h1 r180
  text "-" at -21.59,-31.242 h1 r180
  text "-" at 22.86,-31.242 h1 r180
  text "-" at 30.861,-31.242 h1 r180
  text "+" at -30.099,-35.052 h1 r90
  text "+" at 23.114,-35.052 h1 r90
  text "+" at -21.59,-35.306 h1 r90
  text "+" at 31.115,-35.306 h1 r90